# EAGLE board MRF24J40MA_Breakout_verC (EAGLE 6.4)
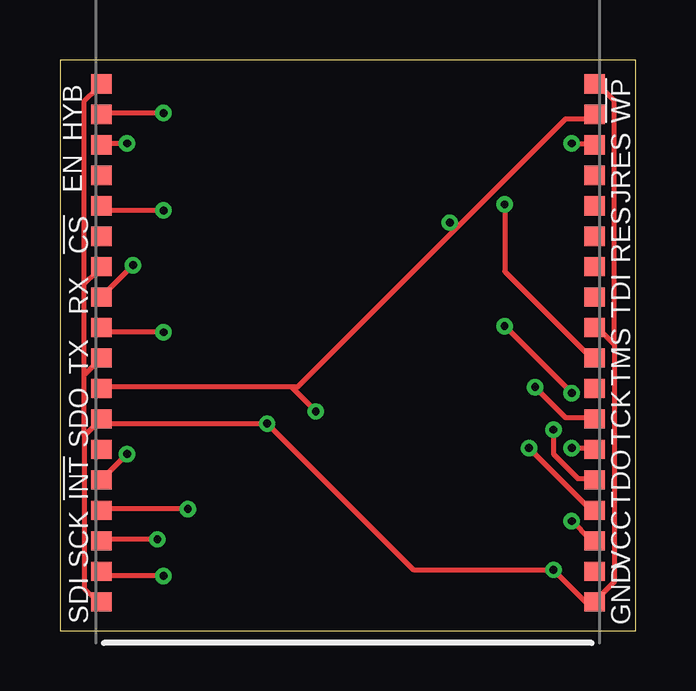
[diagram p0: board, top side]
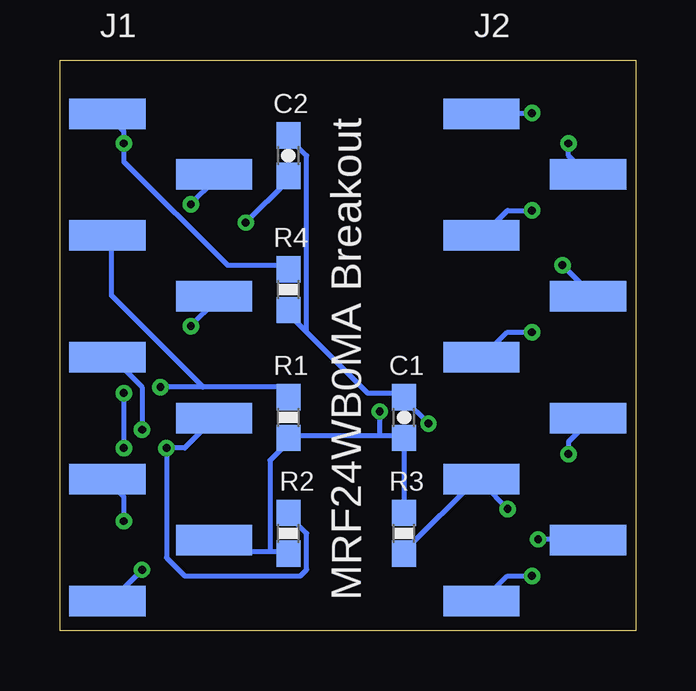
[diagram p1: board, bottom side, seen from below]

Size 24 x 23.8 mm. Coordinates in mm from the lower left corner, seen from the top.
Outline: 0,0 24,0 24,23.8 0,23.8 0,0
Copper layers (1*16): Top 0.0356mm / dielectric 1.5011mm / Bottom 0.0356mm
Design rules "LaenPCBOrder *": minimum track width 8mil, minimum drill 13mil, track to track 6mil, track to pad 6mil, pad to pad 6mil, via to via 6mil, smd to smd 6mil, copper to edge 15mil, drill to drill 6mil, minimum pad ring 7mil, minimum via ring 7mil, stop-mask expansion 4mil, vias tented up to drill 13mil, thermal gap 10mil

## Footprints (pad centres in the part's own frame; a part is rotated, then mirrored left to right if it is on the bottom)
0603-CAP = smd 1.1 x 1: 1 -0.85,0; 2 0.85,0
09-SMD = smd 3.175 x 1.27: 1 -2.223,10.16; 2 2.223,7.62; 3 -2.223,5.08; 4 2.223,2.54; 5 -2.223,0; 6 2.223,-2.54; 7 -2.223,-5.08; 8 2.223,-7.62; 9 -2.223,-10.16
0603-RES = smd 1.1 x 1: 1 -0.85,0; 2 0.85,0
MRF24WB0MA = smd 0.85 x 0.8: 1 -10.29,12.76; 2 -10.29,11.49; 3 -10.29,10.22; 4 -10.29,8.95; 5 -10.29,7.68; 6 -10.29,6.41; 7 -10.29,5.14; 8 -10.29,3.87; 9 -10.29,2.6; 10 -10.29,1.33; 11 -10.29,0.06; 12 -10.29,-1.21; 13 -10.29,-2.48; 14 -10.29,-3.75; 15 -10.29,-5.02; 16 -10.29,-6.29; 17 -10.29,-7.56; 18 -10.29,-8.83; 19 10.27,-8.83; 20 10.27,-7.56; 21 10.27,-6.29; 22 10.27,-5.02; 23 10.27,-3.75; 24 10.27,-2.48; 25 10.27,-1.21; 26 10.27,0.06; 27 10.27,1.33; 28 10.27,2.6; 29 10.27,3.87; 30 10.27,5.14; 31 10.27,6.41; 32 10.27,7.68; 33 10.27,8.95; 34 10.27,10.22; 35 10.27,11.49; 36 10.27,12.76

## Placement (x,y rotation side)
C1  1uF  [0603-CAP]  9.65,8.89 90 bottom
C2  1uF  [0603-CAP]  14.48,19.81 90 bottom
J1  CON-09  [09-SMD]  19.8,11.4 0 bottom
J2  CON-09  [09-SMD]  4.2,11.4 0 bottom
R1  4.7K  [0603-RES]  14.48,8.89 270 bottom
R2  4.7K  [0603-RES]  14.48,4.06 270 bottom
R3  4.7K  [0603-RES]  9.65,4.06 90 bottom
R4  4.7K  [0603-RES]  14.48,14.22 90 bottom
U$1  MRF24WB0MA  [MRF24WB0MA]  12,13.97 180 top

## Library data of the parts
C1 C2 R1-R4 = SparkFun-Passives
J1 J2 = Connectors
U$1 = mrf24wb0ma

## Nets
!CS: J2.3 U$1.23
!INT: J2.7 R3.1 U$1.33
!WP: J1.1 R4.2 U$1.16
EN: J2.2 U$1.21
GND: C1.2 C2.2 J1.9 R4.1 U$1.1 U$1.10 U$1.18 U$1.19 U$1.25 U$1.28 U$1.30 U$1.36
HYBERNATE: J2.1 U$1.20
RESET: J1.3 R1.1 U$1.7
RST: J1.2 U$1.9
RX: J2.4 U$1.26
SCK: J2.8 U$1.34
SDI: J2.9 U$1.35
SDO: J2.6 U$1.32
TCK: J1.6 R2.1 U$1.4
TDI: J1.4 U$1.6
TDO: J1.7 U$1.3
TMS: J1.5 U$1.5
TX: J2.5 U$1.27
VCC: C1.1 C2.1 J1.8 R1.2 R2.2 R3.2 U$1.17 U$1.29

## Tracks (layer width: path | path; a pad name or v marks a point on that pad's centre or on a via)
!CS  (via drill 0.33)
  Top 0.203: v4.32,17.53 1.78,17.53 U$1.23
  Bottom 0.203: v4.32,17.53 5.33,17.53 6.35,16.51 J2.3
!INT  (via drill 0.33)
  Top 0.203: v5.33,5.08 1.78,5.08 U$1.33
  Bottom 0.203: v5.33,5.08 6.35,6.1 J2.7 6.6,6.35 9.65,3.3 R3.1
!WP  (via drill 0.33)
  Top 0.203: v21.34,20.32 22.1,20.32 U$1.16
  Bottom 0.203: J1.1 21.84,21.34 21.34,20.83 v21.34,20.32 21.34,19.56 17.02,15.24 14.48,15.24 R4.2
EN  (via drill 0.33)
  Top 0.203: v2.79,20.32 1.78,20.32 U$1.21
  Bottom 0.203: v2.79,20.32 2.79,19.81 2.03,19.05 J2.2
GND  (via drill 0.33)
  Top 0.203: 23.11,11.94 23.11,2.03 22.35,1.27 U$1.1 22.1,1.02 v20.57,2.54 14.73,2.54 v8.64,8.64 1.78,8.64 U$1.30 1.52,8.64 1.02,8.13 | 23.11,11.94 22.35,12.7 U$1.10 | 23.11,11.94 23.11,22.1 22.61,22.61 22.35,22.61 U$1.18 | 1.02,8.13 1.02,1.78 1.52,1.27 U$1.36 | 1.02,10.67 1.52,11.18 U$1.28 | 1.02,8.13 1.02,10.67 | 1.02,14.48 1.52,14.99 U$1.25 | 1.02,10.67 1.02,14.48 | 1.02,14.48 1.02,22.1 1.52,22.61 U$1.19
  Bottom 0.203: v20.57,2.54 21.84,1.27 J1.9 | 13.72,12.45 14.48,13.21 R4.1 | 13.72,12.45 11.18,9.91 9.65,9.91 C1.2 9.65,9.65 v8.64,8.64 | 13.72,12.45 13.72,19.81 14.48,20.57 C2.2
HYBERNATE  (via drill 0.33)
  Top 0.203: v4.32,21.59 1.78,21.59 U$1.20
  Bottom 0.203: v4.32,21.59 6.35,21.59 J2.1
RESET  (via drill 0.33)
  Top 0.203: v19.81,10.16 21.08,8.89 22.1,8.89 U$1.7
  Bottom 0.203: 18.03,10.16 14.73,10.16 14.48,9.91 R1.1 | 18.03,10.16 v19.81,10.16 | 18.03,10.16 21.84,13.97 21.84,16.26 J1.3
RST  (via drill 0.33)
  Top 0.203: v18.54,17.78 18.54,14.99 22.1,11.43 U$1.9
  Bottom 0.203: v18.54,17.78 17.53,18.8 J1.2
RX  (via drill 0.33)
  Top 0.203: v3.05,15.24 1.78,13.97 U$1.26
  Bottom 0.203: v3.05,15.24 1.78,13.97 J2.4
SCK  (via drill 0.33)
  Top 0.203: v4.06,3.81 1.78,3.81 U$1.34
  Bottom 0.203: v4.06,3.81 2.03,3.81 J2.8
SDI  (via drill 0.33)
  Top 0.203: v4.32,2.29 1.78,2.29 U$1.35
  Bottom 0.203: v4.32,2.29 5.33,2.29 6.35,1.27 J2.9
SDO  (via drill 0.33)
  Top 0.203: v2.79,7.37 1.78,6.35 U$1.32
  Bottom 0.203: v2.79,7.37 2.79,7.87 2.03,8.64 J2.6
TCK  (via drill 0.33)
  Top 0.203: v19.56,7.62 22.1,5.08 U$1.4
  Bottom 0.203: J1.6 17.78,8.64 18.8,7.62 v19.56,7.62 19.56,3.05 18.8,2.29 13.97,2.29 13.72,2.54 13.72,4.06 14.48,4.83 R2.1
TDI  (via drill 0.33)
  Top 0.203: v21.34,7.62 22.1,7.62 U$1.6 | v18.54,12.7 v21.34,9.91
  Bottom 0.203: v21.34,9.91 v21.34,7.62 | v18.54,12.7 17.53,13.72 J1.4
TDO  (via drill 0.33)
  Top 0.203: v21.34,4.57 22.1,3.81 U$1.3
  Bottom 0.203: v21.34,4.57 21.34,5.59 21.84,6.1 J1.7
TMS  (via drill 0.33)
  Top 0.203: v20.57,8.38 20.57,7.37 21.59,6.35 22.1,6.35 U$1.5
  Bottom 0.203: v20.57,8.38 20.57,10.16 21.84,11.43 J1.5
TX  (via drill 0.33)
  Top 0.203: v4.32,12.45 1.78,12.45 U$1.27
  Bottom 0.203: v4.32,12.45 5.33,12.45 6.35,11.43 J2.5
VCC  (via drill 0.33)
  Top 0.203: 9.65,10.16 9.91,10.16 16.51,16.76 | 9.65,10.16 1.78,10.16 U$1.29 | 16.51,16.76 21.08,21.34 22.1,21.34 U$1.17 | 16.51,16.76 v16.26,17.02 | 9.65,10.16 v10.67,9.14
  Bottom 0.203: 15.24,3.3 17.27,3.3 17.53,3.56 J1.8 | 15.24,3.3 14.48,3.3 R2.2 | R3.2 C1.1 9.65,8.13 10.67,8.13 | 10.67,8.13 14.48,8.13 R1.2 14.48,7.87 15.24,7.11 15.24,3.3 | v16.26,17.02 14.48,18.8 C2.1 | v10.67,9.14 10.67,8.13

## Text on the board
tPlace: HYB | !WP | EN | JRES | !CS | RES | RX | TDI | TX | TMS | SDO | TCK | !INT | TDO | SCK | VCC | GND | SDI
bPlace: MRF24WB0MA Breakout